# Altium PCB testing_board.PcbDoc
Units mm, origin at the board's own origin, x right, y up, seen from the top; angles counter-clockwise.
Board outline 152.4 x 101.6 mm, 2 copper layers (F.Cu, B.Cu); 82 components, 118 nets, 277 pads, 97 vias.
Unrouted connection lines stored in the file: 1.
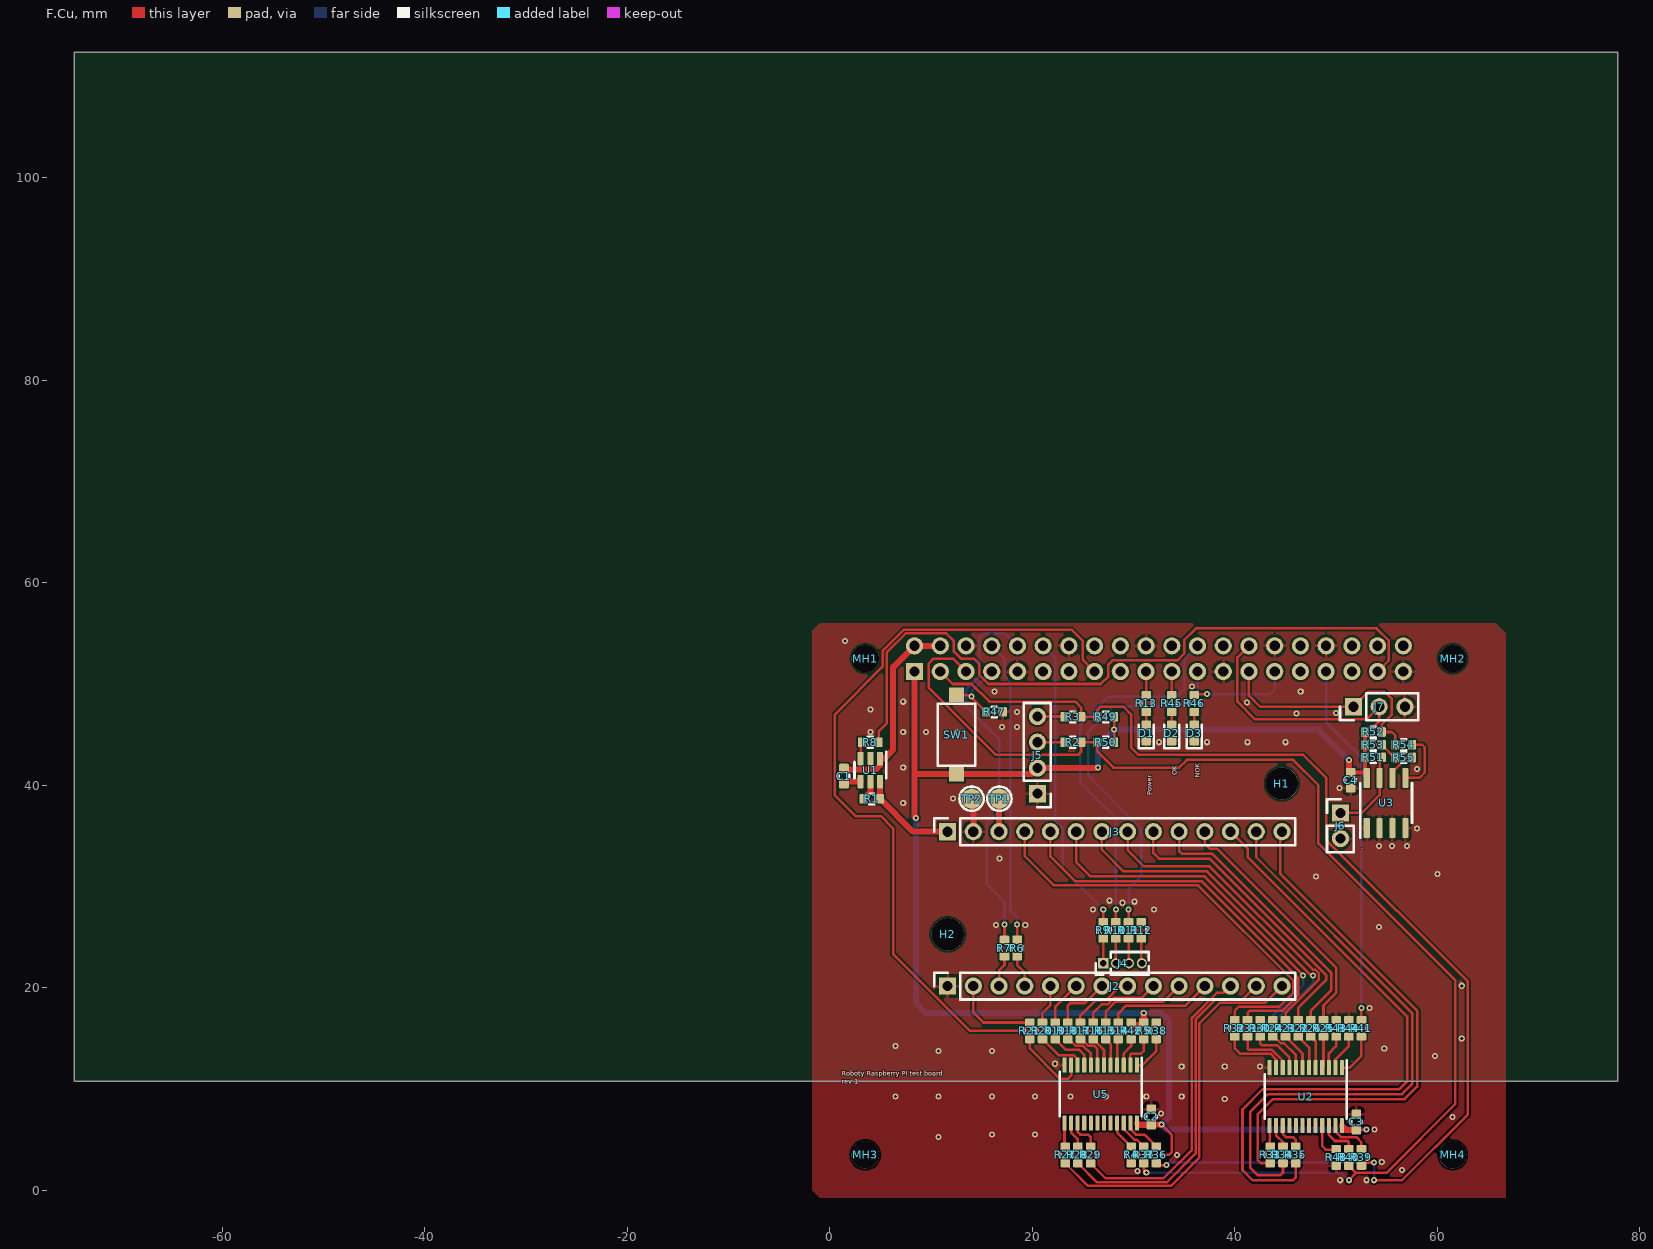
[diagram p0: F.Cu view]
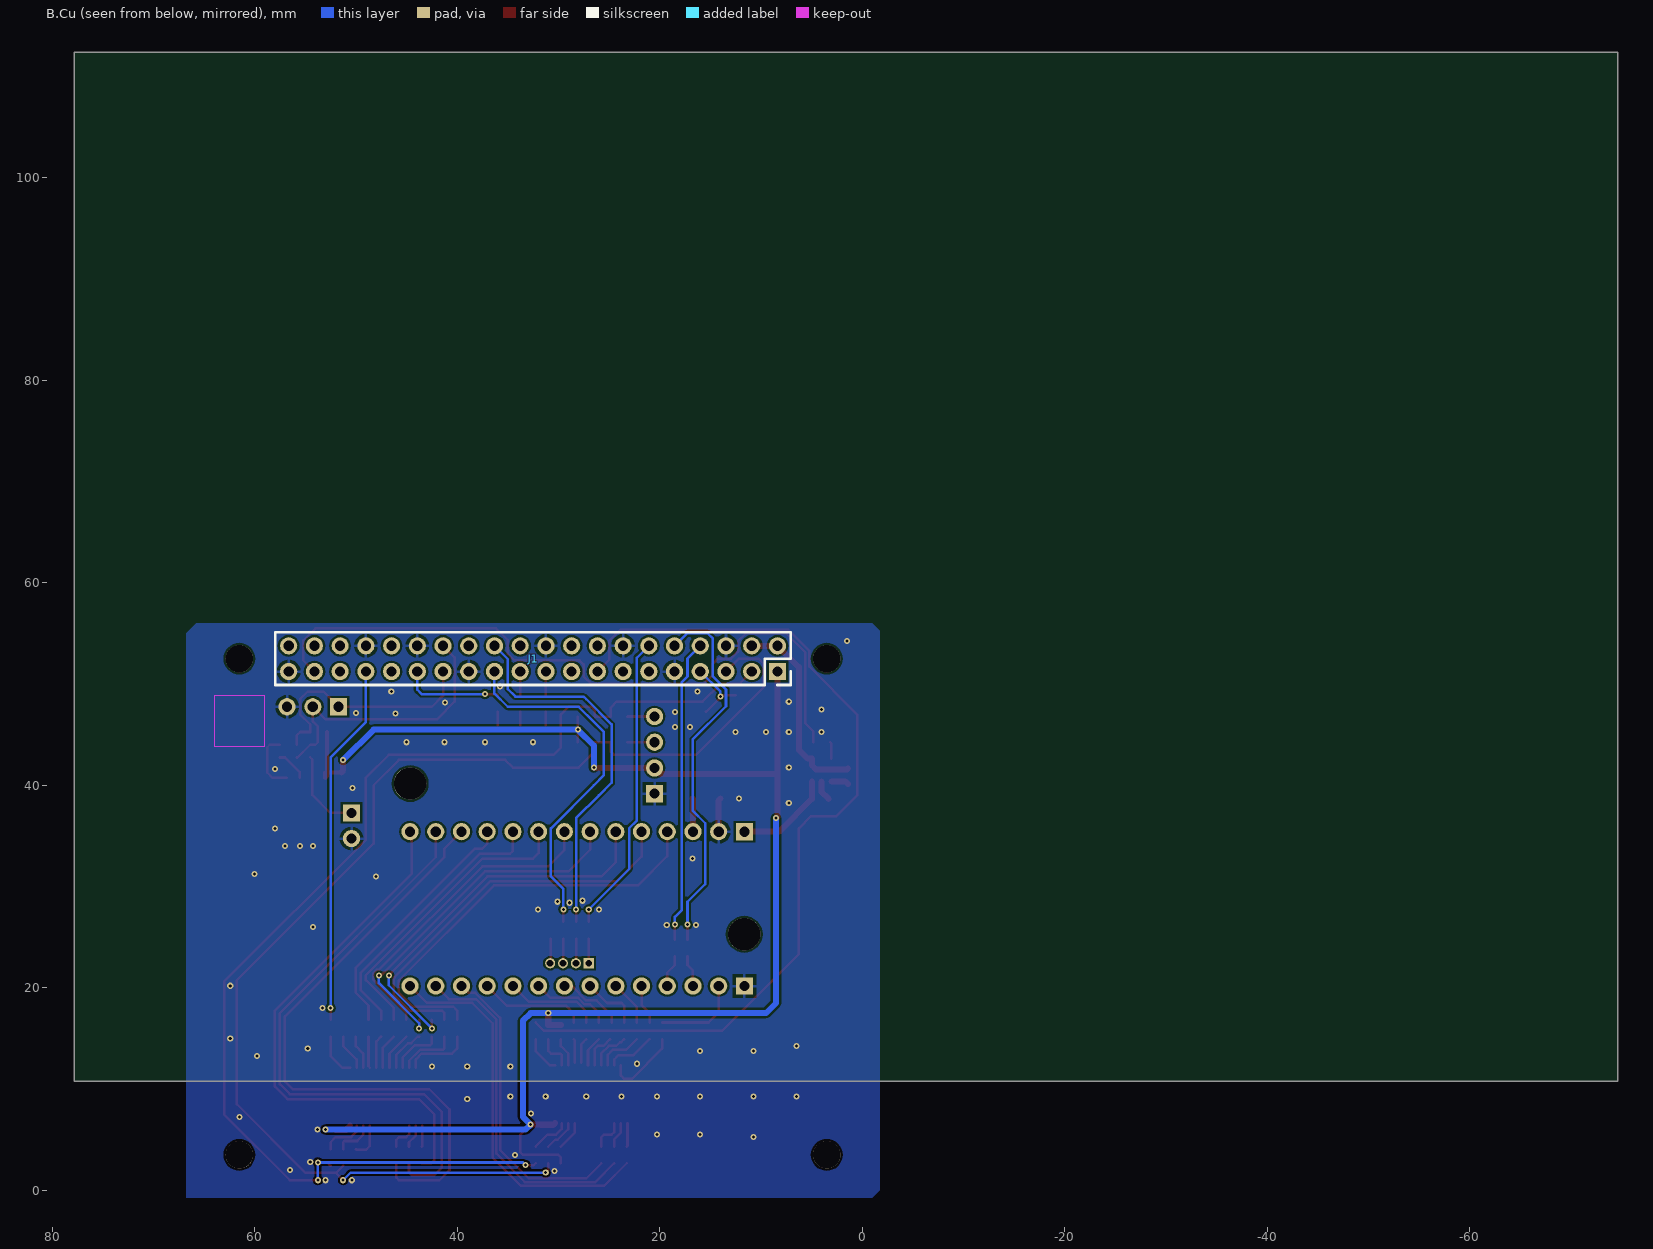
[diagram p1: B.Cu view, seen from below]

## Layer stack, top to bottom
F.Mask: solder mask 0.0102, Solder Resist, Dk 3.5
F.Cu: signal copper 0.0356
Dielectric 1: dielectric 0.32, FR-4, Dk 4.8
B.Cu: signal copper 0.0356
B.Mask: solder mask 0.0102, Solder Resist, Dk 3.5

## Board outline
-74.6,10.775 77.8,10.775 77.8,112.375 -74.6,112.375

## Design rules (kind name [scope] priority, off if disabled: settings)
Clearance "Clearence 0,2_Polygon" [InNamedPolygon('F.Cu-GND') OR InNamedPolygon('B.Cu-GND')] p1: gap=0.2 ignorepadtopadclearanceinfootprint=FALSE
MinimumSolderMaskSliver [All] p1: minsoldermaskwidth=0
PolygonConnect Polygon_B.Cu-GND_ConnectDirect [IsNamedPolygon('B.Cu-GND') vs IsVia] p1: connectstyle=Direct reliefconductorwidth=0.254 reliefentries=4 polygonreliefangle="90 Angle" airgapwidth=0.254
PolygonConnect Polygon_B.Cu-GND_ConnectRelief45 [IsNamedPolygon('B.Cu-GND') vs (IsThruPin or IsSMTPin) and (PadShape_AllLayers = 'Round')] p2: connectstyle=Relief reliefconductorwidth=0.3 reliefentries=4 polygonreliefangle="45 Angle" airgapwidth=0.3
PolygonConnect Polygon_B.Cu-GND_ConnectRelief90 [IsNamedPolygon('B.Cu-GND') vs (IsThruPin or IsSMTPin) and (PadShape_AllLayers <> 'Round')] p3: connectstyle=Relief reliefconductorwidth=0.3 reliefentries=4 polygonreliefangle="90 Angle" airgapwidth=0.3
PolygonConnect Polygon_F.Cu-GND_ConnectDirect [IsNamedPolygon('F.Cu-GND') vs IsVia] p4: connectstyle=Direct reliefconductorwidth=0.254 reliefentries=4 polygonreliefangle="90 Angle" airgapwidth=0.254
PolygonConnect Polygon_F.Cu-GND_ConnectRelief45 [IsNamedPolygon('F.Cu-GND') vs (IsThruPin or IsSMTPin) and (PadShape_AllLayers = 'Round')] p5: connectstyle=Relief reliefconductorwidth=0.3 reliefentries=4 polygonreliefangle="45 Angle" airgapwidth=0.3
PolygonConnect Polygon_F.Cu-GND_ConnectRelief90 [IsNamedPolygon('F.Cu-GND') vs (IsThruPin or IsSMTPin) and (PadShape_AllLayers <> 'Round')] p6: connectstyle=Relief reliefconductorwidth=0.3 reliefentries=4 polygonreliefangle="90 Angle" airgapwidth=0.3
RoutingVias [All] p1: holewidth=0.711 width=1.27 viastyle="Through Hole" minholewidth=0.711 minwidth=1.27 maxholewidth=0.711 maxwidth=1.27
SilkToSilkClearance [All] p1: silktosilkclearance=0
SilkToSolderMaskClearance [IsPad] p1: minsilkscreentomaskgap=0 clearancetoexposedcopper=TRUE
SolderMaskExpansion [All] p1: expansion=0.102 istentingtop=FALSE
Width [All] p1: maxlimit=10 minlimit=0.254 preferedwidth=0.254 minimp=50.000000 maximp=50.000000 favimp=50.000000
27 further rules are at their usual default settings.

## Components (designator, comment, footprint, x,y, rotation, side; value= is the part's Value field where it differs from the comment)
C1 "~" C_0603_1608Metric 1.4,40.9 r270 top
C2 "100n" C_0603_1608Metric 31.75,7.25 r90 top
C3 "100n" C_0603_1608Metric 52,6.75 r90 top
C4 "100n" C_0603_1608Metric 51.425,40.5 r270 top
D1 "LED_Power" LED_0603_1608Metric 31.25,45.15 r90 top
D2 "LED_testOK" LED_0603_1608Metric 33.75,45.15 r90 top
D3 "LED_testNOK" LED_0603_1608Metric 36,45.15 r90 top
H1 "MountingHole" MountingHole_3.2mm_M3_ISO14580 44.64,40.17 r0 top
H2 "MountingHole" MountingHole_3.2mm_M3_ISO14580 11.65,25.29 r0 top
J1 "Comment" PinSocket_2x20_P2.54mm_Vertical 8.37,51.23 r90 bottom
J2 "Left_" PinSocket_1x14_P2.54mm_Vertical 11.63,20.175 r90 top
J3 "Right_" PinSocket_1x14_P2.54mm_Vertical 11.63,35.415 r90 top
J4 "SWD" PinHeader_1x04_P1.27mm_Vertical 27,22.425 r90 top
J5 "OLED" PinHeader_1x04_P2.54mm_Vertical 20.5,39.17 r180 top
J6 "WP_jumper" PinHeader_1x02_P2.54mm_Vertical 50.425,37.275 r0 top
J7 "I2C_prob" PinHeader_1x03_P2.54mm_Vertical 51.71,47.75 r90 top
MH1 "MountingHole_2.7mm_M2.5" MountingHole_2.7mm_M2.5 3.5,52.5 r0 top
MH2 "MountingHole_2.7mm_M2.5" MountingHole_2.7mm_M2.5 61.5,52.5 r0 top
MH3 "MountingHole_2.7mm_M2.5" MountingHole_2.7mm_M2.5 3.5,3.5 r0 top
MH4 "MountingHole_2.7mm_M2.5" MountingHole_2.7mm_M2.5 61.5,3.5 r0 top
R1 "1k" R_0603_1608Metric 4.15,38.65 r180 top
R2 "0" R_0603_1608Metric 24,44.25 r0 top
R3 "0" R_0603_1608Metric 24,46.75 r180 top
R4 "1k" R_0603_1608Metric 29.75,3.5 r90 top
R5 "1k" R_0603_1608Metric 31,15.75 r90 top
R6 "0" R_0603_1608Metric 18.5,23.925 r90 top
R7 "0" R_0603_1608Metric 17.25,23.925 r270 top
R8 "0" R_0603_1608Metric 4,44.25 r180 top
R9 "0" R_0603_1608Metric 27,25.675 r270 top
R10 "0" R_0603_1608Metric 28.25,25.675 r270 top
R11 "0" R_0603_1608Metric 29.5,25.675 r270 top
R12 "0" R_0603_1608Metric 30.75,25.675 r270 top
R13 "1k" R_0603_1608Metric 31.25,48.075 r270 top
R14 "1k" R_0603_1608Metric 28.5,15.75 r90 top
R15 "1k" R_0603_1608Metric 27.25,15.75 r270 top
R16 "1k" R_0603_1608Metric 26,15.75 r90 top
R17 "1k" R_0603_1608Metric 24.75,15.75 r270 top
R18 "1k" R_0603_1608Metric 23.5,15.75 r90 top
R19 "1k" R_0603_1608Metric 22.25,15.75 r270 top
R20 "1k" R_0603_1608Metric 21,15.75 r90 top
R21 "1k" R_0603_1608Metric 19.75,15.75 r270 top
R22 "1k" R_0603_1608Metric 46.25,16 r90 top
R23 "1k" R_0603_1608Metric 45,16 r270 top
R24 "1k" R_0603_1608Metric 43.75,16 r90 top
R25 "1k" R_0603_1608Metric 48.75,16 r270 top
R26 "1k" R_0603_1608Metric 47.5,16 r90 top
R27 "1k" R_0603_1608Metric 23.25,3.5 r90 top
R28 "1k" R_0603_1608Metric 24.5,3.5 r270 top
R29 "1k" R_0603_1608Metric 25.75,3.5 r90 top
R30 "1k" R_0603_1608Metric 42.5,16 r90 top
R31 "1k" R_0603_1608Metric 41.25,16 r270 top
R32 "1k" R_0603_1608Metric 40,16 r90 top
R33 "1k" R_0603_1608Metric 43.5,3.5 r90 top
R34 "1k" R_0603_1608Metric 44.75,3.5 r270 top
R35 "1k" R_0603_1608Metric 46,3.5 r90 top
R36 "0" R_0603_1608Metric 32.25,3.5 r270 top
R37 "0" R_0603_1608Metric 31,3.5 r90 top
R38 "0" R_0603_1608Metric 32.25,15.75 r90 top
R39 "0" R_0603_1608Metric 52.5,3.25 r270 top
R40 "0" R_0603_1608Metric 51.25,3.25 r90 top
R41 "0" R_0603_1608Metric 52.5,16 r90 top
R42 "1k" R_0603_1608Metric 29.75,15.75 r270 top
R43 "1k" R_0603_1608Metric 50,16 r270 top
R44 "1k" R_0603_1608Metric 51.25,16 r90 top
R45 "1k" R_0603_1608Metric 33.75,48.075 r270 top
R46 "1k" R_0603_1608Metric 36,48.075 r270 top
R47 "10k" R_0603_1608Metric 16.25,47.25 r180 top
R48 "1k" R_0603_1608Metric 50,3.25 r90 top
R49 "10k" R_0603_1608Metric 27.25,46.75 r0 top
R50 "10k" R_0603_1608Metric 27.25,44.25 r180 top
R51 "10k" R_0603_1608Metric 53.675,42.75 r0 top
R52 "10k" R_0603_1608Metric 53.675,45.26 r0 top
R53 "10k" R_0603_1608Metric 53.675,44 r0 top
R54 "0" R_0603_1608Metric 56.675,44 r180 top
R55 "0" R_0603_1608Metric 56.675,42.74 r0 top
SW1 "Start" SW_SPST_CK_RS282G05A3 12.5,45 r90 top
TP1 "3V3" TestPoint_Pad_D2.0mm 16.75,38.675 r0 top
TP2 "GND" TestPoint_Pad_D2.0mm 14,38.675 r0 top
U1 "TPS22917DBV" SOT-23-6 4,41.5 r270 top
U2 "TCA9555PWR" TSSOP-24_4.4x7.8mm_P0.65mm 47,9.25 r270 top
U3 "CAT24C32" SOIC-8_3.9x4.9mm_P1.27mm 54.925,38.25 r90 top
U5 "TCA9555PWR" TSSOP-24_4.4x7.8mm_P0.65mm 26.75,9.5 r270 top

## Footprints (in the part's own frame and the unit in brackets; to place one, negate y for a bottom-side part, rotate by r counter-clockwise, add the part's x,y. Pads: shape width x height; smd on the part's side, far side on the other; paste and mask are expansions set on the pad)
C_0603_1608Metric [mm]
  rrect25% 0.9x0.95 smd mask+0: 1(-0.775,0) 2(0.775,0)
  silkscreen extent -0.14,-0.51 0.14,0.51
LED_0603_1608Metric [mm]
  rrect25% 0.875x0.95 smd mask+0: 1(-0.787,0) 2(0.787,0)
  silkscreen extent -1.49,-0.73 0.8,0.73
MountingHole_2.7mm_M2.5 [mm]
  round 2.7 hole 2.7 paste-2.7 mask+0: Un1(0,0)
MountingHole_3.2mm_M3_ISO14580 [mm]
  round 3.2 hole 3.2 paste-3.2 mask+0: Un1(0,0)
PinHeader_1x02_P2.54mm_Vertical [mm]
  rect 1.7x1.7 hole 1 paste-1.7 mask+0: 1(0,0)
  rrect100% 1.7x1.7 hole 1 paste-1.7 mask+0: 2(0,-2.54)
  silkscreen extent -1.33,-3.87 1.33,1.33
PinHeader_1x03_P2.54mm_Vertical [mm]
  rect 1.7x1.7 hole 1 paste-1.7 mask+0: 1(0,0)
  rrect100% 1.7x1.7 hole 1 paste-1.7 mask+0: 2(0,-2.54) 3(0,-5.08)
  silkscreen extent -1.33,-6.41 1.33,1.33
PinHeader_1x04_P1.27mm_Vertical [mm]
  rect 1x1 hole 0.68 paste-1 mask+0: 1(0,0)
  rrect100% 1x1 hole 0.68 paste-1 mask+0: 2(0,-1.27) 3(0,-2.54) 4(0,-3.81)
  silkscreen extent -1.11,-4.5 1.11,0.76
PinHeader_1x04_P2.54mm_Vertical [mm]
  rect 1.7x1.7 hole 1 paste-1.7 mask+0: 1(0,0)
  rrect100% 1.7x1.7 hole 1 paste-1.7 mask+0: 2(0,-2.54) 3(0,-5.08) 4(0,-7.62)
  silkscreen extent -1.33,-8.95 1.33,1.33
PinSocket_1x14_P2.54mm_Vertical [mm]
  rect 1.7x1.7 hole 1 paste-1.7 mask+0: 1(0,0)
  rrect100% 1.7x1.7 hole 1 paste-1.7 mask+0: 2(0,-2.54) 3(0,-5.08) 4(0,-7.62) 5(0,-10.16) 6(0,-12.7) 7(0,-15.24) 8(0,-17.78) 9(0,-20.32) 10(0,-22.86) 11(0,-25.4) 12(0,-27.94) 13(0,-30.48) 14(0,-33.02)
  silkscreen extent -1.33,-34.35 1.33,1.33
PinSocket_2x20_P2.54mm_Vertical [mm]
  rect 1.7x1.7 hole 1 paste-1.7 mask+0: 1(0,0)
  rrect100% 1.7x1.7 hole 1 paste-1.7 mask+0: 2(2.54,0) 3(0,2.54) 4(2.54,2.54) 5(0,5.08) 6(2.54,5.08) 7(0,7.62) 8(2.54,7.62) 9(0,10.16) 10(2.54,10.16) 11(0,12.7) 12(2.54,12.7) 13(0,15.24) 14(2.54,15.24) 15(0,17.78) 16(2.54,17.78) 17(0,20.32) 18(2.54,20.32) 19(0,22.86) 20(2.54,22.86) 21(0,25.4) 22(2.54,25.4) 23(0,27.94) 24(2.54,27.94) 25(0,30.48) 26(2.54,30.48) 27(0,33.02) 28(2.54,33.02) 29(0,35.56) 30(2.54,35.56) 31(0,38.1) 32(2.54,38.1) 33(0,40.64) 34(2.54,40.64) 35(0,43.18) 36(2.54,43.18) 37(0,45.72) 38(2.54,45.72) 39(0,48.26) 40(2.54,48.26)
  silkscreen extent -1.33,-1.33 3.87,49.59
R_0603_1608Metric [mm]
  rrect25% 0.8x0.95 smd mask+0: 1(-0.825,0) 2(0.825,0)
  silkscreen extent -0.24,-0.52 0.24,0.52
SOIC-8_3.9x4.9mm_P1.27mm [mm]
  rrect25% 1.95x0.6 smd mask+0: 1(-2.475,1.905) 2(-2.475,0.635) 3(-2.475,-0.635) 4(-2.475,-1.905) 5(2.475,-1.905) 6(2.475,-0.635) 7(2.475,0.635) 8(2.475,1.905)
  silkscreen extent -3.45,-2.56 1.95,2.56
SOT-23-6 [mm]
  rrect25% 1.325x0.6 smd mask+0: 1(-1.138,0.95) 2(-1.138,0) 3(-1.138,-0.95) 4(1.138,-0.95) 5(1.138,0) 6(1.138,0.95)
  silkscreen extent -1.8,-1.56 0.8,1.56
SW_SPST_CK_RS282G05A3 [mm]
  rect 1.5x1.5 smd mask+0: 1(-3.9,0) 2(3.9,0)
  silkscreen extent -3.06,-1.85 3.06,1.85
TestPoint_Pad_D2.0mm [mm]
  round 2 smd paste-2 mask+0: 1(0,0)
  silkscreen extent -1.2,-1.2 1.2,1.2
TSSOP-24_4.4x7.8mm_P0.65mm [mm]
  rrect25% 1.475x0.4 smd mask+0: 1(-2.863,3.575) 2(-2.863,2.925) 3(-2.863,2.275) 4(-2.863,1.625) 5(-2.863,0.975) 6(-2.863,0.325) 7(-2.863,-0.325) 8(-2.863,-0.975) 9(-2.863,-1.625) 10(-2.863,-2.275) 11(-2.863,-2.925) 12(-2.863,-3.575) 13(2.863,-3.575) 14(2.863,-2.925) 15(2.863,-2.275) 16(2.863,-1.625) 17(2.863,-0.975) 18(2.863,-0.325) 19(2.863,0.325) 20(2.863,0.975) 21(2.863,1.625) 22(2.863,2.275) 23(2.863,2.925) 24(2.863,3.575)
  silkscreen extent -3.6,-4.04 2.2,4.04

## Part data
C1 C2 C3 C4: library part C_0603_1608Metric, "Capacitor SMD 0603 (1608 Metric), square (rectangular) end terminal, IPC_7351 nominal, (Body size source: IPC-SM-782 page 76, https://www.pcb-3d.com/wordpress/wp-content/uploads/ipc-sm-782a_amendment_1_and_2.pdf), generated with kicad-footprint-generator", Sheetfile=testing_board.kicad_sch, ki_description="Unpolarized capacitor", ki_keywords="cap capacitor"
D1 D2 D3: library part LED_0603_1608Metric, "LED SMD 0603 (1608 Metric), square (rectangular) end terminal, IPC_7351 nominal, (Body size source: http://www.tortai-tech.com/upload/download/2011102023233369053.pdf), generated with kicad-footprint-generator", Sheetfile=testing_board.kicad_sch, ki_description="Light emitting diode", ki_keywords="LED diode"
H1 H2: library part MountingHole_3.2mm_M3_ISO14580, "Mounting Hole 3.2mm, no annular, M3, ISO14580", Sheetfile=testing_board.kicad_sch, ki_description="Mounting Hole without connection", ki_keywords="mounting hole"
J1: library part PinSocket_2x20_P2.54mm_Vertical, "Through hole straight socket strip, 2x20, 2.54mm pitch, double cols (from Kicad 4.0.7), script generated", Sheetfile=testing_board.kicad_sch, ki_description="Generic connector, double row, 02x20, odd/even pin numbering scheme (row 1 odd numbers, row 2 even numbers), script generated (kicad-library-utils/schlib/autogen/connector/)", ki_keywords=connector
J2 J3: library part PinSocket_1x14_P2.54mm_Vertical, "Through hole straight socket strip, 1x14, 2.54mm pitch, single row (from Kicad 4.0.7), script generated", Sheetfile=testing_board.kicad_sch, ki_description="Generic connector, single row, 01x14, script generated", ki_keywords=connector
J4: library part PinHeader_1x04_P1.27mm_Vertical, "Through hole straight pin header, 1x04, 1.27mm pitch, single row", Sheetfile=testing_board.kicad_sch, ki_description="Generic connector, single row, 01x04, script generated", ki_keywords=connector
J5: library part PinHeader_1x04_P2.54mm_Vertical, "Through hole straight pin header, 1x04, 2.54mm pitch, single row", Sheetfile=testing_board.kicad_sch, ki_description="Generic connector, single row, 01x04, script generated", ki_keywords=connector
J6: library part PinHeader_1x02_P2.54mm_Vertical, "Through hole straight pin header, 1x02, 2.54mm pitch, single row", Sheetfile=testing_board.kicad_sch, ki_description="Generic connector, single row, 01x02, script generated", ki_keywords=connector
J7: library part PinHeader_1x03_P2.54mm_Vertical, "Through hole straight pin header, 1x03, 2.54mm pitch, single row", Sheetfile=testing_board.kicad_sch, ki_description="Generic connector, single row, 01x03, script generated", ki_keywords=connector
MH1 MH2 MH3 MH4: "Mounting Hole 2.7mm, no annular, M2.5"
R1 R2 R3 R4 R5 R6 R7 R8 R9 R10 R11 R12 R13 R14 R15 R16 R17 R18 R19 R20 R21 R22 R23 R24 R25 R26 R27 R28 R29 R30 R31 R32 R33 R34 R35 R36 R37 R38 R39 R40 R41 R42 R43 R44 R45 R46 R47 R48 R49 R50 R51 R52 R53 R54 R55: library part R_0603_1608Metric, "Resistor SMD 0603 (1608 Metric), square (rectangular) end terminal, IPC_7351 nominal, (Body size source: IPC-SM-782 page 72, https://www.pcb-3d.com/wordpress/wp-content/uploads/ipc-sm-782a_amendment_1_and_2.pdf), generated with kicad-footprint-generator", Sheetfile=testing_board.kicad_sch, ki_description=Resistor, ki_keywords="R res resistor"
SW1: library part SW_SPST_CK_RS282G05A3, "https://www.mouser.com/ds/2/60/RS-282G05A-SM_RT-1159762.pdf", Sheetfile=testing_board.kicad_sch, ki_description="Push button switch, generic, two pins", ki_keywords="switch normally-open pushbutton push-button"
TP1 TP2: library part TestPoint_Pad_D2.0mm, "SMD pad as test Point, diameter 2.0mm", Sheetfile=testing_board.kicad_sch, ki_description="test point", ki_keywords="test point tp"
U1: library part SOT-23-6, "SOT, 6 Pin (https://www.jedec.org/sites/default/files/docs/Mo-178c.PDF variant AB), generated with kicad-footprint-generator ipc_gullwing_generator.py", Sheetfile=testing_board.kicad_sch, ki_description="1V to 5.5V, 2A, 80mΩ Ultra-Low Leakage Load Switch, SOT23-6", ki_keywords="high-side power distribution switch"
U2 U5: library part TSSOP-24_4.4x7.8mm_P0.65mm, "TSSOP, 24 Pin (JEDEC MO-153 Var AD https://www.jedec.org/document_search?search_api_views_fulltext=MO-153), generated with kicad-footprint-generator ipc_gullwing_generator.py", Sheetfile=testing_board.kicad_sch, ki_description="16-bit I/O expander, I2C and SMBus interface, interrupts, w/ pull-ups, TSSOP-24 package", ki_keywords="ti parallel port"
U3: library part SOIC-8_3.9x4.9mm_P1.27mm, "SOIC, 8 Pin (JEDEC MS-012AA, https://www.analog.com/media/en/package-pcb-resources/package/pkg_pdf/soic_narrow-r/r_8.pdf), generated with kicad-footprint-generator ipc_gullwing_generator.py", Sheetfile=testing_board.kicad_sch, ki_description="128 kb CMOS Serial EEPROM, SOIC-8/TSSOP-8/DFN-8", ki_keywords="I2C EEPROM Serial 128kb"

## Via types
v1: diameter 0.6, hole 0.3, F.Cu to B.Cu, tented both sides, 97 vias

## Nets (pads, with @x,y where several pads share a name; then routed paths per layer and width w, separated by ;. In a path a pad name is that pad's centre, name@x,y a point inside that pad or via, vN(x,y) a via of type N, cw(c..) or ccw(c..) an arc to the next point about the centre after c; other vN are vias at no path point)
+3V3: C2.1 C3.1 C4.1 J1.1 J5.2 R4.1 R5.2 R42.1 R49.2 R50.1 R51.1 R52.1 R53.1 SW1.1 U2.24 U3.8 U5.24 | length 166.8
  F.Cu w0.25: R50.1 R49.2 ; R4.1 29.75,3.25 30,3.5 33.5,3.5 33.75,3.75 33.75,5.5 v1(32.75,6.5) ; C3.1 52.025,6 v1(52.985,6)
  F.Cu w0.4: C4.1 53.02,41.275 U3.8 52.85,40.895 R51.1 R53.1 R52.1
  F.Cu w0.6: J1.1 8.37,45.23 ; v1(8.5,36.75) 8.37,36.88 8.37,45.23 ; v1(26.5,41.75) 26.46,41.71 J5.2 19.89,41.1 SW1.1 8.37,41.1 8.37,45.23 ; R42.1@29.75,16.325 31,16.325 v1(31,17.5) ; U5.24 30.487,6.475 C2.1 ; C2.1@31.775,6.5 v1(32.75,6.5) ; U2.24 50.988,5.975 C3.1 ; v1(51.25,42.5) 51.25,41.45 C4.1
  B.Cu w0.6: v1(8.5,36.75) 8.5,18.5 9.5,17.5 v1(31,17.5) 32.75,17.5 33.5,16.75 33.5,7.25 v1(32.75,6.5) 33.25,6 v1(52.985,6) ; v1(26.5,41.75) 26.5,43.925 v1(28.075,45.5) 48.25,45.5 v1(51.25,42.5)
+5V: C1.1 J1.2 J1.4 U1.1 | length 19.8
  F.Cu w0.6: C1.1 1.527,41.548 4.548,41.548 4.95,41.95 U1.1 5.388,42.638 6.25,43.5 6.25,51.65 J1.2 J1.4
A2: R39.1 U2.23 | length 4.3
  F.Cu w0.25: U2.23 49.925,5.802 50.477,5.25 52,5.25 52.5,4.75 R39.1
B2: R40.2 U2.22 | length 3.9
  F.Cu w0.25: U2.22 49.275,5.475 49.877,4.873 51.127,4.873 51.25,4.75 R40.2
C2: R41.1 U2.1 | length 4.3
  F.Cu w0.25: U2.1 51.362,12.113 52.5,13.25 R41.1
GND: C2.2 C3.2 C4.2 D1.1 D2.1 D3.1 J1.6 J1.9 J1.14 J1.20 J1.25 J1.30 J1.34 J1.39 J2.1 J3.2 J5.1 J6.2 J7.3 R43.1 R44.2 R47.1 R48.1 TP2.1 U1.2 U2.12 U3.1 U3.2 U3.3 U3.4 U5.12 | length 3.3
  F.Cu w0.6: TP2.1 14.17,38.505 J3.2
  other v1: 50.4,1 53,1 30.4,1.9 56.5,2 54.5,2.8 34.3,3.5 10.75,5.25 16,5.5 20.25,5.5 53.8,6 61.5,7.25 32.7,7.6 39,9 6.5,9.25 10.75,9.25 16,9.25 20.25,9.25 23.75,9.25 27.25,9.25 31.25,9.25 34.75,9.25 34.75,12.25 39,12.25 42.5,12.25 22.25,12.5 59.75,13.25 10.75,13.75 16,13.75 54.75,14 6.5,14.25 62.4,15 53.3,18 62.4,20.2 54.25,26 16.4,26.2 19.3,26.2 26,27.75 32,27.75 28.9,28.4 30.1,28.5 27.6,28.6 48,31 60,31.25 16.75,32.75 54.25,34 55.5,34 57,34 58,35.75 7.25,38.25 12.175,38.675 50.35,39.75 58,41.6 7.25,41.75 32.5,44.25 37.25,44.25 41.25,44.25 45,44.25 4,45.25 7.25,45.25 9.5,45.25 12.5,45.25 17,45.75 18.5,45.75 46.1,47.1 50,47.125 18.5,47.25 4,47.5 41.2,48.175 7.25,48.25 16.25,49.25 46.5,49.25 35.75,49.75 1.5,54.25
GPIO2{slash}SDA1: J1.3 R3.1 R36.2 R39.2 R49.1 | length 121.9
  F.Cu w0.25: J1.3 12.14,50 14,50 15.75,48.25 24.25,48.25 24.825,47.675 R3.1 R49.1 26.425,47.425 26.75,47.75 29,47.75 29.75,47 29.75,43.75 30.5,43 46.75,43 49,40.75 49,34.602 63,20.602 63,7.5 56.5,1 v1(53.75,1) ; R36.2 32.425,2.5 v1(33.25,2.5) ; R39.2 52.825,2.75 v1(53.75,2.75)
  B.Cu w0.25: v1(33.25,2.5) 33.5,2.75 v1(53.75,2.75) 53.75,2.25 v1(53.75,1)
GPIO3{slash}SCL1: J1.5 R2.2 R37.1 R40.1 R50.2 | length 125.1
  F.Cu w0.25: J1.5 12.18,52.5 10.25,52.5 9.75,52 9.75,49.646 16.396,43 24.5,43 24.825,43.325 R2.2 R50.2 26.425,43.325 28,41.75 34.5,41.75 35.25,42.5 45.75,42.5 48.25,40 48.25,34.25 61.75,20.75 61.75,8.5 55,1.75 51.925,1.75 ; R37.1 31,2 v1(31.25,1.75) ; v1(51.25,1) 51.925,1.675 51.925,1.75 ; R40.1 51.925,1.75
  B.Cu w0.25: v1(31.25,1.75) 50.5,1.75 v1(51.25,1)
GPIO4{slash}GPCLK0: J1.7 R47.2 SW1.2 | length 7
  F.Cu w0.25: SW1.2 13.775,48.9 13.925,48.75 v1(14,48.75) 14,48.675 R47.2
  B.Cu w0.25: v1(14,48.75) 14,49.24 J1.7
GPIO5: J1.29 R46.1 | length 9.9
  F.Cu w0.25: R46.1 36.1,49 v1(37.25,49)
  B.Cu w0.25: v1(37.25,49) 43.5,49 43.93,49.43 J1.29
GPIO6: J1.31
GPIO7{slash}SPI0.CE1: J1.26
GPIO8{slash}SPI0.CE0: J1.24 R10.1 | length 37.5
  F.Cu w0.25: R10.1 v1(28.25,27.75)
  B.Cu w0.25: v1(28.25,27.75) 28.25,36 28.25,36.75 26,39 24.75,40.25 24.75,44.5 24.75,46 27.25,48.5 27.5,48.75 34,48.75 34.25,48.75 35,49.5 35,52.46 J1.24
GPIO9{slash}SPI0.MISO: J1.21 R45.1 | length 2.3
  F.Cu w0.25: R45.1 33.75,51.21 J1.21
GPIO10{slash}SPI0.MOSI: J1.19 R13.1 | length 2.3
  F.Cu w0.25: J1.19 31.25,51.21 R13.1
GPIO11{slash}SPI0.SCLK: J1.23 R11.1 | length 36
  F.Cu w0.25: R11.1 v1(29.5,27.75)
  B.Cu w0.25: v1(29.5,27.75) 29.5,29.75 30.75,31 30.75,35.25 30.75,35.75 26.5,40 25.5,41 25.5,45.25 26.5,46.25 28,47.75 35,47.75 36.31,49.06 J1.23
GPIO13{slash}PWM1: J1.33 R41.2 | length 35.9
  F.Cu w0.25: R41.2 v1(52.5,18)
  B.Cu w0.25: J1.33 49.01,46.24 52.5,42.75 v1(52.5,18)
GPIO14{slash}TXD0: J1.8 R6.2 | length 30.1
  F.Cu w0.25: R6.2 v1(18.5,26.25)
  B.Cu w0.25: J1.8 17.25,52.51 17.25,50.75 17.812,50.188 17.812,27.688 18.5,27 v1(18.5,26.25)
GPIO15{slash}RXD0: J1.10 R7.1 | length 37.4
  F.Cu w0.25: R7.1 v1(17.25,26.25)
  B.Cu w0.25: v1(17.25,26.25) 17.25,28.5 15.5,30.25 15.5,36.25 16.75,37.5 16.75,44.5 13.448,47.802 13.448,49.448 14.75,50.75 14.75,54.5 15.25,55 17.3,55 J1.10
GPIO16: J1.36
GPIO17: J1.11
GPIO18{slash}PCM.CLK: J1.12 R9.1 | length 29.7
  F.Cu w0.25: R9.1 v1(27,27.75)
  B.Cu w0.25: J1.12 22.25,52.59 22.25,36.513 23,35.763 23,31.75 v1(27,27.75)
GPIO20{slash}PCM.DIN: J1.38
GPIO21{slash}PCM.DOUT: J1.40
GPIO22: J1.15 R38.2 | length 89.8
  F.Cu w0.25: J1.15 25,52.38 25,54.25 23.873,55.377 7.344,55.377 5.225,53.258 5.225,51.707 0.5,46.982 0.5,39 2.549,36.951 5.049,36.951 6.25,35.75 6.25,23.351 13.851,15.75 31.425,15.75 R38.2
GPIO24: J1.18
GPIO25: J1.22
GPIO26: J1.37 R8.1 | length 70.7
  F.Cu w0.25: R8.1 4.825,45.325 5.602,46.102 5.602,53.102 7.5,55 11.5,55 12.25,54.25 12.25,53.206 12.956,52.5 14.25,52.5 14.75,52 14.75,50.912 15.662,50 26.75,50 27.5,50.75 27.5,51.934 27.898,52.332 34.332,52.332 35,53 35,54.354 36.146,55.5 54,55.5 55.192,54.308 55.192,52.332 J1.37
GPIO27: J1.13
HDR_LFT_PA0: J2.8 R17.1 | length 6.6
  F.Cu w0.25: R17.1 24.75,17.283 26.217,18.75 27.252,18.75 28.677,20.175 J2.8
HDR_LFT_PA1: J2.7 R18.2 | length 5.8
  F.Cu w0.25: R18.2 23.5,18.25 23.75,18.5 25.195,18.5 J2.7
HDR_LFT_PA2: J2.6 R19.1 | length 4.5
  F.Cu w0.25: R19.1 22.25,18.095 J2.6
HDR_LFT_PA3: J2.5 R20.2 | length 3.9
  F.Cu w0.25: R20.2 21,17.5 21.79,18.29 J2.5
HDR_LFT_PA4: J3.11 R25.1 | length 24.9
  F.Cu w0.25: J3.11 37.03,34.22 37.5,33.75 38.25,33.75 50,22 50,19.5 48.75,18.25 R25.1
HDR_LFT_PA5: J3.10 R26.2 | length 27.4
  F.Cu w0.25: J3.10 34.49,33.51 34.75,33.25 37.75,33.25 49.5,21.5 49.5,19.75 47.5,17.75 R26.2
HDR_LFT_PA6: J3.9 R22.2 | length 29.7
  F.Cu w0.25: J3.9 31.95,33.3 32.5,32.75 37.5,32.75 49,21.25 49,20.75 46.25,18 R22.2
HDR_LFT_PA7: J3.8 R23.1 | length 31.7
  F.Cu w0.25: J3.8 29.41,33.59 31,32 37.5,32 47.713,21.787 47.93,21.787 48.287,21.43 48.287,21.213 48.302,21.198 48.302,20.802 45,17.5 R23.1
HDR_LFT_PA8: J2.2 R21.1 | length 8.6
  F.Cu w0.25: J2.2 14.17,17.58 15.175,16.575 R21.1
HDR_LFT_PA15: J2.9 R16.2 | length 8
  F.Cu w0.25: R16.2 26,17.517 26.856,18.373 27.408,18.373 28.039,19.004 30.779,19.004 J2.9
HDR_LFT_PB4: J2.10 R15.1 | length 9.4
  F.Cu w0.25: R15.1 27.25,17.682 28.195,18.627 32.942,18.627 J2.10
HDR_RGT_PB5: J2.11 R14.2 | length 10.6
  F.Cu w0.25: R14.2 28.5,17.483 29.267,18.25 35.105,18.25 J2.11
HDR_RGT_PB7: J2.12 R29.1 | length 29.9
  F.Cu w0.25: R29.1 27.227,1.198 32.948,1.198 35.746,3.996 35.746,17.039 38.207,19.5 38.895,19.5 J2.12
HDR_RGT_PB8: J2.13 R28.2 | length 34.2
  F.Cu w0.25: R28.2 26.354,0.821 33.321,0.821 36.123,3.623 36.123,16.873 38.131,18.881 40.816,18.881 J2.13
HDR_RGT_PB9: J2.14 R27.1 | length 38.3
  F.Cu w0.25: R27.1 25.481,0.444 33.694,0.444 36.5,3.25 36.5,16.5 38.504,18.504 42.979,18.504 J2.14
HDR_RGT_PB10: J3.7 R24.2 | length 35.5
  F.Cu w0.25: J3.7 26.87,33.63 29,31.5 37.25,31.5 47.532,21.218 v1(47.718,21.218) ; v1(43.75,16.001) R24.2
  B.Cu w0.25: v1(43.75,16.001) 43.75,16.5 47.718,20.468 v1(47.718,21.218)
HDR_RGT_PB12: J3.6 R30.2 | length 37.9
  F.Cu w0.25: J3.6 24.33,32.42 25.75,31 37,31 46.735,21.265 v1(46.735,21.235) ; v1(42.5,16.001) R30.2
  B.Cu w0.25: v1(42.5,16.001) 46.75,20.252 46.75,21.219 v1(46.735,21.235)
HDR_RGT_PB13: J3.5 R31.1 | length 40
  F.Cu w0.25: J3.5 21.79,32.96 24.25,30.5 36.75,30.5 46.183,21.067 46.183,21.006 46.25,20.939 46.25,19.283 44.717,17.75 41.5,17.75 41.25,17.5 R31.1
HDR_RGT_PB14: J3.4 R32.2 | length 42.6
  F.Cu w0.25: J3.4 19.25,33 22.127,30.123 36.377,30.123 45.752,20.748 45.752,19.502 44.377,18.127 40.377,18.127 40,17.75 R32.2
HDR_RGT_PB15: J3.12 R35.1 | length 62.5
  F.Cu w0.25: J3.12 41.25,33.735 41.25,32.934 57,17.184 57,10.75 56.25,10 42.75,10 40.75,8 40.75,2 41.75,1 45.75,1 46,1.25 R35.1
HDR_RGT_PC0: J3.14 R33.1 | length 53.6
  F.Cu w0.25: R33.1 42.575,2.675 42.25,3 42.25,7.5 43.75,9 56.75,9 58,10.25 58,17.75 44.5,31.25 44.5,35.265 J3.14
HDR_RGT_PC1: J3.13 R34.2 | length 58.5
  F.Cu w0.25: J3.13 42.11,32.89 57.5,17.5 57.5,10.5 56.5,9.5 43.25,9.5 41.5,7.75 41.5,2.25 42.25,1.5 44.5,1.5 44.75,1.75 R34.2
ID_SCL: J1.28 J7.2 R53.2 R55.1 | length 27.7
  F.Cu w0.25: J1.28 40.25,52.63 40.25,48.25 42,46.5 53,46.5 J7.2 54.25,46.283 53.75,45.783 53.75,44.25 54,44 R53.2 55.76,42.74 R55.1
ID_SDA: J1.27 J7.1 R52.2 R54.2 | length 23.9
  F.Cu w0.25: J1.27 41.39,48.86 42.5,47.75 J7.1 53.21,49.25 54.75,49.25 55.5,48.5 55.5,47 54.5,46 R52.2 55.49,45.26 55.85,44.9 R54.2
Net-(D1-A): D1.2 R13.2 | length 1.3
  F.Cu w0.25: D1.2 R13.2
Net-(D2-A): D2.2 R45.2 | length 1.3
  F.Cu w0.25: D2.2 R45.2
Net-(D3-A): D3.2 R46.2 | length 1.3
  F.Cu w0.25: D3.2 R46.2
Net-(J3-Pin_3): J3.3 TP1.1 | length 3.3
  F.Cu w0.6: J3.3 16.71,38.635 TP1.1
Net-(J5-Pin_3): J5.3 R2.1 | length 2.7
  F.Cu w0.25: J5.3 R2.1
Net-(J5-Pin_4): J5.4 R3.2 | length 2.7
  F.Cu w0.25: J5.4 23.135,46.79 R3.2
Net-(J6-Pin_1): J6.1 R51.2 U3.7 | length 8.4
  F.Cu w0.25: J6.1 52.525,37.275 54.29,39.04 U3.7 54.29,42.54 R51.2
Net-(U1-CT): C1.2 U1.4 | length 1.7
  F.Cu w0.6: C1.2 1.637,40.362 U1.4
Net-(U1-QOD): R1.2 U1.5 | length 2
  F.Cu w0.6: R1.2 4,39.325 U1.5
Net-(U2-A0): R48.2 U2.21 | length 3.6
  F.Cu w0.25: U2.21 48.625,4.375 49,4 49.925,4 R48.2
Net-(U2-A1): R44.1 U2.2 | length 3.6
  F.Cu w0.25: U2.2 49.925,12.925 51.25,14.25 R44.1
Net-(U2-A2): R43.2 U2.3 | length 3.4
  F.Cu w0.25: U2.3 49.275,13.525 50,14.25 R43.2
Net-(U2-P00): R25.2 U2.4 | length 3.1
  F.Cu w0.25: U2.4 48.75,12.238 R25.2
Net-(U2-P01): R26.1 U2.5 | length 3.3
  F.Cu w0.25: R26.1 47.975,14.7 U2.5
Net-(U2-P02): R22.1 U2.6 | length 3.5
  F.Cu w0.25: R22.1 47.325,14.1 U2.6
Net-(U2-P03): R23.2 U2.7 | length 3.8
  F.Cu w0.25: R23.2 46.675,13.5 U2.7
Net-(U2-P04): R24.1 U2.8 | length 4.3
  F.Cu w0.25: R24.1 43.886,15.175 44.538,14.523 44.866,14.523 46.025,13.364 U2.8
Net-(U2-P05): R30.1 U2.9 | length 5.1
  F.Cu w0.25: R30.1 42.5,14.5 42.663,14.337 44.157,14.337 45.375,13.119 U2.9
Net-(U2-P06): R31.2 U2.10 | length 5.8
  F.Cu w0.25: R31.2 41.25,14 41.373,13.877 43.656,13.877 44.725,12.808 U2.10
Net-(U2-P07): R32.1 U2.11 | length 6.5
  F.Cu w0.25: R32.1 40,14 40.5,13.5 43.5,13.5 44.075,12.925 U2.11
Net-(U2-P10): R33.2 U2.13 | length 2.1
  F.Cu w0.25: U2.13 43.425,4.4 R33.2
Net-(U2-P11): R34.1 U2.14 | length 2.3
  F.Cu w0.25: U2.14 44.075,5.425 44.75,4.75 R34.1
Net-(U2-P12): R35.2 U2.15 | length 3
  F.Cu w0.25: U2.15 44.725,5.558 45.033,5.25 45.75,5.25 46,5 R35.2
Net-(U3-SCL): R55.2 U3.6 | length 3.1
  F.Cu w0.25: U3.6 55.56,41.31 56.99,42.74 R55.2
Net-(U3-SDA): R54.1 U3.5 | length 6
  F.Cu w0.25: U3.5 58.225,40.725 58.75,41.25 58.75,43.75 58.5,44 R54.1
Net-(U5-A0): R4.2 U5.21 | length 2.9
  F.Cu w0.25: U5.21 28.375,5.7 R4.2
Net-(U5-A1): R5.1 U5.2 | length 3.7
  F.Cu w0.25: U5.2 29.675,13.392 29.783,13.5 30.75,13.5 31,13.75 R5.1
Net-(U5-A2): R42.2 U5.3 | length 2.9
  F.Cu w0.25: U5.3 29.025,13.525 29.75,14.25 R42.2
Net-(U5-P00): R14.1 U5.4 | length 2.4
  F.Cu w0.25: U5.4@28.375,12.612 28.375,14.8 R14.1
Net-(U5-P01): R15.2 U5.5 | length 2.5
  F.Cu w0.25: R15.2 27.725,14.45 U5.5@27.725,12.612
Net-(U5-P02): R16.1 U5.6 | length 3
  F.Cu w0.25: R16.1 27.075,13.85 U5.6
Net-(U5-P03): R17.2 U5.7 | length 3.5
  F.Cu w0.25: R17.2@24.886,14.925 25.538,14.273 26.119,14.273 26.425,13.967 U5.7
Net-(U5-P04): R18.1 U5.8 | length 3.9
  F.Cu w0.25: R18.1 R18.1@23.798,14.627 ; R18.1@23.934,14.627 24.288,14.273 25.005,14.273 25.775,13.503 U5.8
Net-(U5-P05): R19.2 U5.9 | length 4.5
  F.Cu w0.25: R19.2 23.279,13.896 24.598,13.896 25.125,13.369 U5.9
Net-(U5-P06): R20.1 U5.10 | length 4.9
  F.Cu w0.25: R20.1 22.573,13.352 24.071,13.352 24.475,12.948 U5.10
Net-(U5-P07): R21.2 U5.11 | length 7.4
  F.Cu w0.25: R21.2 19.75,14 22.75,11 23.5,11 23.825,11.325 U5.11
Net-(U5-P10): R27.2 U5.13 | length 2.3
  F.Cu w0.25: U5.13 23.175,4.4 R27.2
Net-(U5-P11): R28.1 U5.14 | length 2.6
  F.Cu w0.25: U5.14 23.825,5.713 24.5,5.038 R28.1
Net-(U5-P12): R29.2 U5.15 | length 3.3
  F.Cu w0.25: U5.15 24.475,5.775 24.75,5.5 25.5,5.5 25.75,5.25 R29.2
Net-(U5-SCL): R37.2 U5.22 | length 3.3
  F.Cu w0.25: U5.22 29.025,6.052 30.077,5 30.325,5 R37.2
Net-(U5-SDA): R36.1 U5.23 | length 3.9
  F.Cu w0.25: U5.23 29.675,6.052 30.227,5.5 31.075,5.5 R36.1
Net-(U5-{\I\N\T\}\)\: R38.1 U5.1 | length 3.7
  F.Cu w0.25: U5.1 30.862,12.363 32.25,13.75 R38.1
ON{slash}OFF: R8.2 U1.3 | length 1.7
  F.Cu w0.25: U1.3 3.05,44.125 R8.2
OUT_MUX1: J1.32
OUT_MUX2: J1.35
OUT_MUX3: J1.16
RST: J4.1 R9.2 | length 2.4
  F.Cu w0.25: J4.1 R9.2
SWCLK: J4.3 R11.2 | length 2.4
  F.Cu w0.25: R11.2 29.5,22.465 J4.3
SWDIO: J4.2 R10.2 | length 2.4
  F.Cu w0.25: R10.2 28.25,22.445 J4.2
SWO: J4.4 R12.2 | length 2.4
  F.Cu w0.25: R12.2 30.75,22.485 J4.4
UART_RX: J2.4 R6.1 | length 3.2
  F.Cu w0.25: R6.1 18.5,22.25 19.25,21.5 J2.4
UART_TX: J2.3 R7.2 | length 3.1
  F.Cu w0.25: J2.3 16.71,21.71 17.25,22.25 R7.2
unconnected-(J1-Pin_17-Pad17): J1.17
unconnected-(R12-Pad1): R12.1
unconnected-(U2-P13-Pad16): U2.16
unconnected-(U2-P14-Pad17): U2.17
unconnected-(U2-P15-Pad18): U2.18
unconnected-(U2-P16-Pad19): U2.19
unconnected-(U2-P17-Pad20): U2.20
unconnected-(U5-P13-Pad16): U5.16
unconnected-(U5-P14-Pad17): U5.17
unconnected-(U5-P15-Pad18): U5.18
unconnected-(U5-P16-Pad19): U5.19
unconnected-(U5-P17-Pad20): U5.20
VDC: J3.1 R1.1 U1.6 | length 9.7
  F.Cu w0.6: U1.6 4.95,38.675 R1.1 8.21,35.415 J3.1
pads on no net: H1.Un1 H2.Un1 MH1.Un1 MH2.Un1 MH3.Un1 MH4.Un1

## Polygon pours and split planes (outlines as drawn)
GND on F.Cu "F.Cu-GND" (solid, remove dead copper, pour order 0): -1,56 65.75,56 66.75,55 66.75,-0.75 -1,-0.75 -1.75,0 -1.75,55.25
GND on B.Cu "B.Cu-GND" (solid, remove dead copper, pour order 1): -1,56 65.75,56 66.75,55 66.75,-0.75 -1,-0.75 -1.75,0 -1.75,55.25

## Keep-outs
B.Cu:
  region: 64,43.86 59,43.86 59,48.86 64,48.86

## Silkscreen, mask and mechanical layers (free items; w line width, h text height)
F.SilkS:
  text "OK" at 34.481,41 h0.81 r90
  text "NOK" at 36.731,40.75 h0.81 r90
  text "Power" at 31.979,39 h0.81 r90
  text "." at 52.5,33.463 h0.81
  text "." at 31.25,12.713 h0.81
  text "." at 51.5,12.463 h0.81
  text "Roboty Raspberry PI test board / rev 1" at 1.2,10.318 h0.81
F.Mask:
  region: 51.4,11.55 51.25,11.625 51.4,11.7
  region: 31.15,11.825 31,11.9 31.15,11.975
  region: 53.085,34 52.935,34 53.01,34.15
  region: 5.85,42.8 5.7,42.875 5.85,42.95
Edge.Cuts:
  lines w0.254: 62,56 cw(c62,53) 65,53 ; 62,56 cw(c62,53) 65,53 ; 62,56 3,56 ccw(c3,53) 0,53 0,37 ccw(c0.5,37) 0.5,36.5 4.5,36.5 cw(c4.5,36) 5,36 5,20 cw(c4.5,20) 4.5,19.5 0.5,19.5 0.499,19.5 ccw(c0.5,19) 0,19 0,3 ccw(c3,3) 3,0 62,0 ccw(c62,3) 65,3 65,53